# Allegro board ATLAS_PPGFPC_V1_A.brd
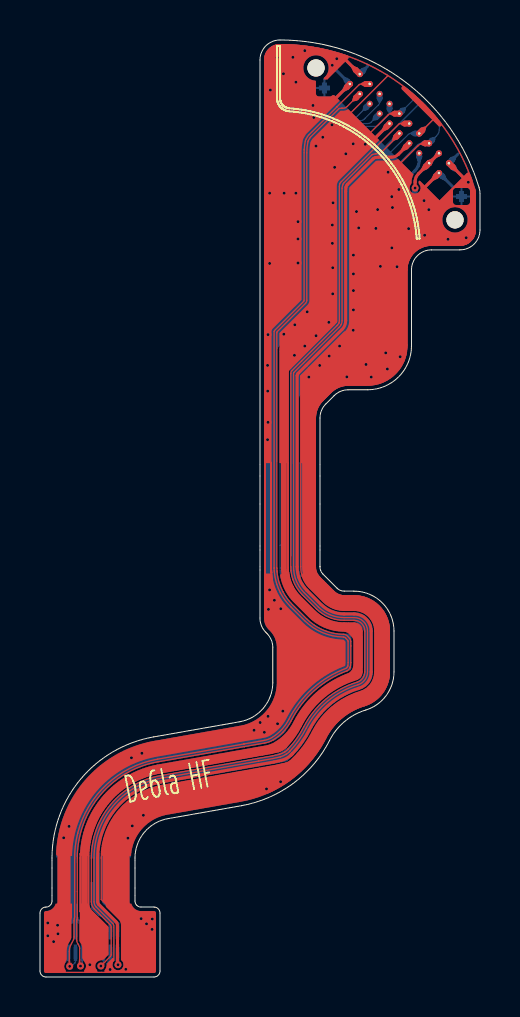
[diagram p0: board, top side]
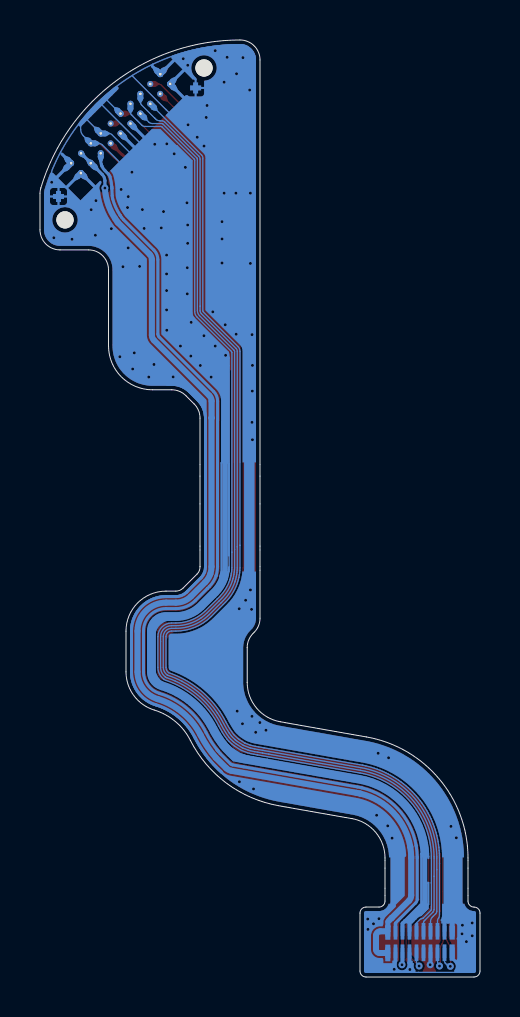
[diagram p1: board, bottom side, seen from below]

Outline 22 x 46.88 mm; copper layers: TOP, BOTTOM. Coordinates in mm from the lower left corner of the outline.
Outline path: 0,3.2 0,0.3 arc(0.09,0.09) 0.3,0 5.7,0 arc(5.91,0.09) 6,0.3 6,3.2 arc(5.91,3.41) 5.7,3.5 5.05,3.5 arc(4.84,3.59) 4.75,3.8 4.75,5.96 arc(5.22,7.24) 6.4,7.93 10.07,8.57 arc(12.66,9.69) 14.48,11.84 arc(15.23,12.78) 16.28,13.36 arc(17.31,14.08) 17.7,15.27 17.7,17.31 arc(17.11,18.72) 15.7,19.31 15.21,19.31 arc(15.02,19.34) 14.85,19.45 14.15,20.16 arc(14.08,20.25) 14.03,20.35 arc(14.01,20.44) 14,20.53 14,27.96 arc(14.08,28.35) 14.29,28.67 14.71,29.09 arc(15.03,29.3) 15.41,29.38 16.38,29.38 arc(17.93,30.02) 18.58,31.58 18.58,35.38 arc(18.87,36.09) 19.58,36.38 21,36.38 arc(21.71,36.67) 22,37.38 22,39.19 arc(21.99,39.34) 21.96,39.48 arc(18.2,44.83) 12,46.88 arc(11.29,46.59) 11,45.88 11,17.95 arc(11.08,17.57) 11.29,17.24 11.35,17.19 arc(11.56,16.86) 11.64,16.48 11.64,14.74 arc(11.17,13.46) 9.99,12.77 5.68,12.01 arc(2.04,9.91) 0.6,5.96 0.6,3.8 arc(0.51,3.59) 0.3,3.5 arc(0.09,3.41) 0,3.2

## Design rules (mm)
constraint set DEFAULT: min track width 0.06, pair gap 0.15

## Placement (name value [footprint] x y rotation side)
J2901  OK-114GM018-35(001A)  [CON18P_4D2X0D91X0D46_0D35]  3 1.75 180 bottom
M3001  -  [MARK_0D75_FPC]  14.22 44.48 180 bottom
M3002  -  [MARK_0D75_FPC]  21.08 39.05 180 bottom
NOREF  -  [unnamed]  20.75 37.88 0 top
NOREF#2  -  [unnamed]  13.8 45.48 0 top
TP3000  pthc0d127hc0d3  [PTHC0D127HC0D3]  18.96 42.2 0 top
TP3003  pthc0d127hc0d3  [PTHC0D127HC0D3]  20.45 40.72 0 top
TP3007  pthc0d127hc0d3  [PTHC0D127HC0D3]  17.97 43.19 0 top
TP3011  pthc0d127hc0d3  [PTHC0D127HC0D3]  18.96 41.21 0 top
TP3013  pthc0d127hc0d3  [PTHC0D127HC0D3]  16.49 44.68 0 top
TP3014  pthc0d127hc0d3  [PTHC0D127HC0D3]  15.99 44.18 0 top
TP3016  pthc0d127hc0d3  [PTHC0D127HC0D3]  16.98 43.19 0 top
TP3017  pthc0d127hc0d3  [PTHC0D127HC0D3]  16.49 43.69 0 top
TP3018  pthc0d127hc0d3  [PTHC0D127HC0D3]  17.48 43.69 0 top
TP3019  pthc0d127hc0d3  [PTHC0D127HC0D3]  16.98 44.18 0 top
TP3020  pthc0d127hc0d3  [PTHC0D127HC0D3]  19.46 41.71 0 top
TP3021  pthc0d127hc0d3  [PTHC0D127HC0D3]  19.46 40.72 0 top
TP3022  pthc0d127hc0d3  [PTHC0D127HC0D3]  19.95 41.21 0 top
TP3030  pthc0d127hc0d3  [PTHC0D127HC0D3]  18.47 41.71 0 top
TP3031  pthc0d127hc0d3  [PTHC0D127HC0D3]  15.99 45.17 0 top
TP3033  pthc0d127hc0d3  [PTHC0D127HC0D3]  17.48 42.7 0 top
TP3036  pthc0d127hc0d3  [PTHC0D127HC0D3]  17.97 42.2 0 top
TP3037  pthc0d127hc0d3  [PTHC0D127HC0D3]  15.5 44.68 0 top
TP3038  pthc0d127hc0d3  [PTHC0D127HC0D3]  18.47 42.7 0 top
TP3048  pthc0d127hc0d3  [PTHC0D127HC0D3]  19.95 40.22 0 top

## Library data of the parts
J2901 = OK-114GM018-35_001A
M3001 M3002 = MARK_0D75_FPC
TP3000 TP3003 TP3007 TP3011 TP3013 TP3014 TP3016-TP3022 TP3030 TP3031 TP3033 TP3036-TP3038 TP3048 = pthc0d127hc0d3

## Footprints (pads in the part's own frame, mm; a bottom-side part is the same pattern mirrored in y, then rotated)
CON18P_4D2X0D91X0D46_0D35
  rect 0.18x0.53 smd: 1(-1.225,-0.54) 2(-0.875,-0.54) 3(-0.525,-0.54) 4(-0.175,-0.54) 5(0.175,-0.54) 6(0.525,-0.54) 7(0.875,-0.54) 8(1.225,-0.54) 9(1.225,0.54) 10(0.875,0.54) 11(0.525,0.54) 12(0.175,0.54) 13(-0.175,0.54) 14(-0.525,0.54) 15(-0.875,0.54) 16(-1.225,0.54)
  rect 0.25x0.53 smd: 17(-1.61,0.54) 18(-1.61,-0.54) 19(1.61,-0.54) 20(1.61,0.54)
MARK_0D75_FPC
  custom 0.55x0.55 smd: 1(0,0)
PTHC0D127HC0D3
  round 0.3 hole 0.127: 1(0,0)
unnamed
  round 0.86 hole 0.86 unplated: (0,0)

## Nets
GND: J2901.1 J2901.3 J2901.6 J2901.9 J2901.14 J2901.15 J2901.19 J2901.20(P2_2) M3001.1 M3002.1 TP3000.1 TP3003.1 TP3007.1 TP3020.1 TP3031.1 TP3033.1 TP3036.1 TP3037.1 TP3048.1
AFE_2P8: J2901.2 TP3030.1
AFE_RST: J2901.7 TP3014.1
HRM_INT: J2901.8 TP3013.1
HRM_VLED_5V0: J2901.17 J2901.18 TP3021.1 TP3022.1
PB_THERM: J2901.4 TP3038.1
PPG_SPI1_CLK: J2901.12 TP3016.1
PPG_SPI1_CS: J2901.13 TP3018.1
PPG_SPI1_MISO: J2901.11 TP3019.1
PPG_SPI1_MOSI: J2901.10 TP3017.1
VREG_L20A_1P8: J2901.16 TP3011.1

Pads without a net: J2901 5

## Via types
v1: diameter 0.35, hole 0.15, TOP to BOTTOM, 110 vias

## Routing (per net, layer and track width the routed paths; a pad name or vN(x,y) marks a point on that pad's centre or on a via; arc(x,y) is an arc through that point)
GND: length 390.7
  TOP w0.06: 2.49,0.6 v1(2.49,0.62) 2.49,1.4 2.43,1.46 2.43,1.47 2.43,6.03 2.44,6.17 2.45,6.31 2.46,6.46 2.48,6.6 2.5,6.74 2.53,6.88 2.56,7.02 2.6,7.16 2.64,7.3 2.69,7.43 2.74,7.57 2.8,7.7 2.86,7.83 2.92,7.96 2.99,8.08 3.06,8.21 3.14,8.33 3.22,8.45 3.31,8.56 3.4,8.68 3.49,8.79 3.58,8.89 3.68,9 3.79,9.1 3.89,9.19 4,9.29 4.11,9.38 4.23,9.46 4.35,9.54 4.47,9.62 4.59,9.7 4.72,9.77 4.84,9.83 4.97,9.89 5.11,9.95 5.24,10 5.37,10.05 5.51,10.09 5.65,10.13 5.79,10.17 5.93,10.2 10.81,11.06 11.48,11.17 11.61,11.2 11.93,11.27 arc(12.13,11.36) 12.3,11.49 arc(12.72,12) 13.06,12.57 arc(14.2,14) 15.82,14.88 arc(16.03,15.03) 16.11,15.27 16.11,17.31 arc(15.99,17.59) 15.7,17.71 15.21,17.71 arc(14.41,17.87) 13.73,18.33 13.02,19.03 arc(12.81,19.27) 12.65,19.54 arc(12.64,19.54) 12.64,19.55 arc(12.57,19.7) 12.51,19.87 arc(12.45,20.09) 12.42,20.32 arc(12.41,20.34) 12.41,20.36 arc(12.41,20.37) 12.41,20.37 12.41,20.47 arc(12.41,20.48) 12.41,20.48 12.41,30.28 arc(12.42,30.33) 12.45,30.38 12.53,30.46 arc(12.53,30.46) 12.53,30.46 14.69,32.62 arc(14.75,32.68) 14.8,32.75 arc(14.82,32.77) 14.83,32.8 arc(14.83,32.82) 14.83,32.83 14.83,38.37 ; 2.49,0.6 2.49,0.52 arc(2.41,0.31) 2.21,0.23 ; 2.49,0.6 arc(2.6,0.34) 2.86,0.23 ; 2.86,0.23 2.21,0.23 ; 2.86,0.23 3.36,0.23 v1(3.51,0.38) ; 2.21,0.23 0.97,0.23 0.94,0.26 ; TP3036.1 17.76,41.99 17.76,41.97 arc(17.75,41.95) 17.74,41.93 17.03,41.22 arc(17.01,41.2) 16.98,41.2 16.91,41.2 arc(16.85,41.2) 16.8,41.19 arc(16.8,41.19) 16.8,41.19 arc(16.79,41.19) 16.79,41.19 arc(16.71,41.17) 16.64,41.16 arc(16.61,41.14) 16.59,41.13 15.18,39.71 arc(15.16,39.69) 15.15,39.66 arc(15.14,39.62) 15.13,39.58 arc(15.11,39.52) 15.1,39.46 15.1,32.83 arc(15.09,32.74) 15.06,32.65 arc(15.02,32.58) 14.98,32.53 14.95,32.5 13.18,30.73 12.7,30.25 arc(12.68,30.22) 12.68,30.19 12.68,20.53 arc(12.68,20.44) 12.68,20.35 arc(12.71,20.15) 12.77,19.95 arc(12.95,19.56) 13.21,19.22 13.92,18.52 arc(14.51,18.12) 15.21,17.98 15.7,17.98 arc(16.18,17.78) 16.38,17.31 16.38,15.27 arc(16.24,14.87) 15.9,14.62 arc(14.38,13.8) 13.3,12.44 arc(12.94,11.84) 12.49,11.3 arc(12.49,11.3) 12.49,11.29 arc(12.46,11.27) 12.43,11.24 arc(12.43,11.24) 12.43,11.23 arc(12.38,11.19) 12.33,11.16 arc(12.31,11.15) 12.3,11.14 arc(12.17,11.07) 12.03,11.02 arc(12.02,11.01) 12.01,11.01 11.67,10.93 10.93,10.8 arc(10.93,10.8) 10.93,10.8 6.05,9.94 arc(3.65,8.56) 2.7,5.96 2.7,3.77 arc(2.73,3.62) 2.81,3.5 3.66,2.66 arc(3.68,2.62) 3.69,2.58 arc(3.69,2.54) 3.69,2.5 3.69,0.84 3.51,0.66 v1(3.51,0.38) ; 19.78,42.94 19.7,42.94 19.08,42.33 ; 11.29,44.62 11.23,44.68 11.23,45.88 11.24,46.03 11.29,46.18 11.36,46.31 11.4,46.35 arc(11.66,46.57) 12,46.65 arc(14.8,46.26) 17.38,45.11 ; 17.75,43.19 17.55,43.19 arc(17.47,43.18) 17.41,43.14 16.45,42.17 ; 15.23,32.27 13.43,30.47 13.06,30.1 arc(13.04,30.07) 13.04,30.05 13.04,20.53 arc(13.05,20.29) 13.11,20.06 arc(13.25,19.75) 13.46,19.48 14.17,18.77 arc(14.65,18.45) 15.21,18.34 15.7,18.34 arc(16.43,18.04) 16.74,17.31 16.74,15.27 arc(16.53,14.65) 16,14.28 arc(14.61,13.52) 13.62,12.28 arc(13.13,11.49) 12.49,10.8 12.43,10.74 11.74,10.58 10.97,10.44 6.11,9.59 arc(3.92,8.33) 3.06,5.96 3.06,3.88 3.98,2.96 3.98,2.94 4.04,2.88 4.16,2.88 ; v1(3.51,0.38) 3.65,0.23 4.12,0.23 ; 19.12,41.71 19.26,41.71 ; 17.86,40.58 17.89,40.58 18.89,41.57 arc(19.01,41.66) 19.15,41.71 ; 15.32,43.17 15.47,43.17 17.38,45.08 17.38,45.11 ; 17.38,45.11 arc(19.95,42.83) 21.61,39.82
  TOP w0.1: 12.26,25.85 12.39,25.72 12.39,20.48 12.4,20.23 12.41,20.23 arc(12.43,20.1) 12.46,19.97 ; 2.13,6.21 2.07,6.21 2.02,6.16 arc(2.02,6.06) 2.02,5.96 2.02,3.29 2.07,3.24 ; 21.68,39.05 21.7,39.03 ; 11.48,25.79 11.55,25.72 11.55,20.48 11.55,20.45 11.55,20.43 11.56,20.3 11.56,20.27 11.59,19.92 11.6,19.91 11.6,19.88 ; 2.29,6.22 2.41,6.09 2.41,3.34 2.38,3.31 ; 11.29,25.84 11.25,25.81 11.25,19.97
  TOP w0.15: 15.21,45.96 15.21,45.96 ; 17.33,42.54 16.69,41.9 16.69,41.9 ; 15.79,45.37 15.22,45.95 ; 19.11,39.38 19.8,40.07 ; 14.59,43.77 14.59,43.78 15.36,44.54 ; 20.63,40.53 21.27,39.89 21.27,39.88 ; 19.08,42.33 19.08,42.33 ; 14.66,45.51 14.67,45.51
  TOP w0.2: 21.67,39.4 21.7,39.26 21.7,39.25 21.7,37.35 21.69,37.24 21.65,37.11 21.58,36.99 21.39,36.8 21.27,36.73 21.14,36.69 21,36.68 19.45,36.68 19.2,36.63 18.96,36.53 18.75,36.39 18.57,36.21 18.42,35.99 18.32,35.76 18.28,35.51 ; 18.28,35.57 18.28,35.51 ; 18.28,35.51 18.28,35.4 arc(18.27,35.39) 18.27,35.38 18.27,31.63 arc(18.27,31.58) 18.27,31.53 18.25,31.31 arc(18.23,31.21) 18.21,31.11 18.14,30.9 arc(18.13,30.85) 18.11,30.81 18,30.61 arc(17.95,30.53) 17.88,30.45 17.59,30.16 arc(17.3,29.93) 16.96,29.78 arc(16.62,29.71) 16.27,29.68 15.41,29.68 arc(14.92,29.58) 14.49,29.3 14.08,28.88 arc(13.8,28.46) 13.7,27.97 13.7,20.53 arc(13.71,20.4) 13.74,20.26 arc(13.82,20.09) 13.93,19.95 14.64,19.24 arc(14.9,19.07) 15.21,19.01 15.7,19.01 arc(16.9,18.51) 17.4,17.31 17.4,15.27 arc(17.07,14.26) 16.2,13.64 arc(15.04,13.01) 14.22,11.98 arc(13.01,10.37) 11.33,9.26
  TOP w0.3: 17.82,42.05 17.97,42.2 TP3036.1 ; TP3033.1 17.48,42.69 17.33,42.54 ; 19.26,41.71 TP3020.1 ; 17.97,43.2 TP3007.1 17.75,43.19 ; 20.63,40.53 TP3003.1 ; TP3000.1 18.96,42.2 19.08,42.33 ; 19.8,40.07 TP3048.1 ; TP3037.1 15.36,44.54 ; TP3031.1 15.79,45.37
  BOTTOM w0.06: 19.58,41.83 19.8,42.05 19.83,42.09 arc(19.93,42.23) 19.97,42.41 19.97,42.67 ; 18.96,43.69 16.93,41.66 16.93,41.6 ; 20.89,41.16 20.97,41.25 20.97,41.26 ; 0.3,0.45 0.52,0.23 3.08,0.23 3.36,0.23 v1(3.51,0.38) 3.63,0.25 arc(3.66,0.24) 3.68,0.23 4.37,0.23 arc(4.41,0.25) 4.43,0.29 4.39,0.29 4.3,0.39 ; 11.26,44.07 11.23,44.1 11.23,45.09 11.23,45.88 arc(11.46,46.43) 12,46.65 arc(14.23,46.4) 16.36,45.67 ; 4.3,0.39 4.3,0.39 4.54,0.62 4.83,0.62 5.15,0.29 ; 4.3,0.39 v1(4.29,0.39) ; 19.28,41.71 19.08,41.71 arc(18.97,41.69) 18.88,41.63 17.85,40.6 arc(17.85,40.6) 17.85,40.59 ; 21.42,40 21.41,40.01 arc(21.4,40.03) 21.39,40.05 21.42,40.08 arc(21.44,40.11) 21.44,40.14 arc(21.42,40.28) 21.38,40.41 arc(21.19,40.84) 20.97,41.26 ; 19.09,42.34 19.7,42.94 ; 16.36,45.67 16.38,45.65 16.38,45.56 ; 16.36,45.67 arc(16.88,45.4) 17.39,45.1 ; 16.77,41.99 16.13,41.99 15.72,41.59 15.15,41.59 14.4,40.84 14.4,33.22 arc(14.37,33.09) 14.3,32.98 12.61,31.29 arc(12.59,31.27) 12.59,31.24 12.54,30.97 arc(12.54,30.97) 12.54,30.96 12.54,30.59 12.54,20.53 arc(12.56,20.22) 12.64,19.91 arc(12.64,19.9) 12.64,19.9 arc(12.83,19.48) 13.11,19.13 13.22,19.02 arc(13.22,19.02) 13.22,19.02 13.82,18.42 arc(14.46,18) 15.21,17.85 15.7,17.85 arc(16.08,17.69) 16.24,17.31 16.24,15.27 arc(16.13,14.95) 15.86,14.75 arc(14.29,13.9) 13.18,12.5 arc(13.1,12.34) 13.01,12.19 arc(12.8,11.88) 12.58,11.6 arc(12.58,11.6) 12.58,11.59 arc(12.57,11.59) 12.57,11.58 arc(12.56,11.58) 12.56,11.57 12.17,11.19 arc(12.15,11.17) 12.12,11.16 11.81,11.11 arc(11.74,11.09) 11.67,11.08 arc(11.61,11.06) 11.55,11.05 11.34,11.01 11.04,10.96 10.81,10.92 10.65,10.89 arc(10.65,10.89) 10.65,10.89 10.61,10.89 arc(10.61,10.89) 10.61,10.88 6.02,10.08 arc(3.65,8.77) 2.58,6.27 arc(2.57,6.15) 2.57,6.03 ; 18.75,43.96 18.74,43.96 18.1,43.33 ; 20.97,41.26 arc(19.44,43.42) 17.39,45.1 ; 18.78,42.2 18.54,42.2 arc(18.47,42.19) 18.42,42.16 17.46,41.2 arc(17.41,41.17) 17.36,41.16 ; 17.39,45.1 arc(17.39,45.09) 17.38,45.08 15.69,43.39 15.47,43.16 arc(15.44,43.12) 15.42,43.06
  BOTTOM w0.1: 21.59,39.06 21.59,39.05 M3002.1 ; 14.37,45.05 14.22,44.91 M3001.1 ; 4.23,0.77 4.23,0.5 4.3,0.43 4.3,0.4 v1(4.29,0.39) ; 14.23,43.88 14.22,43.89 M3001.1 ; 20.51,39.05 20.51,39.05 M3002.1 ; M3002.1 21.08,38.54 21.07,38.54 ; M3002.1 21.08,39.6 21.09,39.6 ; 2.96,3.39 2.94,3.41 2.94,6.17 2.88,6.23 ; 2.65,3.58 2.59,3.64 2.59,4.71 2.59,4.71 ; M3001.1 13.67,44.48 13.66,44.49 ; 12.56,20.48 12.57,20.39 12.57,20.29 12.71,20.15 ; 2.59,5.95 2.59,6.03 2.61,6.11 ; 13,20.03 12.92,20.27 12.92,25.72 12.85,25.79 ; 12.64,25.77 12.56,25.68 12.56,21.1 12.56,21.1
  BOTTOM w0.15: 15.63,29.65 15.29,29.65 arc(14.87,29.53) 14.51,29.28 14.1,28.87 arc(13.82,28.45) 13.72,27.97 13.72,20.53 arc(13.73,20.4) 13.76,20.27 arc(13.84,20.11) 13.95,19.97 14.66,19.26 arc(14.91,19.09) 15.21,19.03 15.7,19.03 arc(16.92,18.53) 17.42,17.31 17.42,15.27 arc(17.09,14.24) 16.2,13.62 arc(15.05,12.99) 14.24,11.97 arc(13.66,11.05) 12.93,10.26 ; 1.11,0.66 1.39,0.94 J2901.19 ; 0.95,2.2 0.9,2.14 0.9,2.16 v1(0.9,2.16) ; 15.38,44.79 15.38,44.79 14.72,45.46 ; 21.25,39.92 20.67,40.49 20.67,40.49 ; 19.82,40.1 19.19,39.46 19.19,39.37 ; 20.66,39.51 20.1,40.08 ; 16.14,45.32 16.38,45.56 ; 17.33,42.56 16.72,41.95 16.69,41.95 ; 17.16,41.4 17.16,41.4 17.83,42.07 ; 15.34,44.53 14.68,43.86 14.66,43.86 ; 20.89,41.16 20.6,40.87 ; 15.17,45.93 15.24,45.93 15.84,45.33
  BOTTOM w0.17: 4.22,0.8 4.23,0.81 J2901.1
  BOTTOM w0.18: J2901.6 2.48,0.63 v1(2.49,0.62) ; J2901.9 1.77,2.9 1.78,2.9 ; J2901.3 3.52,0.7 3.51,0.68 v1(3.51,0.38) ; J2901.15 3.88,2.68 3.76,2.8 ; 3.52,2.85 J2901.14
  BOTTOM w0.2: 20.67,40.49 20.67,40.47 ; 0.3,2.8 0.3,0.45
  BOTTOM w0.25: 1.39,2.83 J2901.20
  BOTTOM w0.3: 19.82,40.1 TP3048.1 20.1,40.08 ; 20.67,40.49 20.45,40.72 TP3003.1 20.6,40.87 ; TP3031.1 15.99,45.18 15.84,45.33 ; TP3031.1 16.14,45.32 ; TP3031.1 15.99,45.17 ; 19.58,41.83 TP3020.1 19.28,41.71 ; 15.38,44.79 TP3037.1 15.34,44.53 ; 17.33,42.56 TP3033.1 ; 18.78,42.2 TP3000.1 19.09,42.34 ; TP3007.1 18.1,43.33 ; 17.83,42.07 TP3036.1
  vias: v1(0.39,2.7) v1(0.39,2.06) v1(0.68,1.77) v1(0.88,2.59) v1(1.18,6.96) v1(1.45,7.54) v1(4.4,6.95) v1(4.57,10.97) v1(4.61,7.56) v1(5.09,11.19) v1(5.05,2.92) v1(5.17,8.09) v1(5.33,2.66) v1(5.61,2.9) v1(5.6,2.38) v1(10.7,12.35) v1(11.01,12.73) v1(11.22,12.24) v1(11.32,9.41) v1(11.4,32.14) v1(11.38,30.6) v1(11.38,29.31) v1(11.4,27.75) v1(11.38,26.88) v1(11.42,18.39) v1(11.4,13.04) v1(11.52,44.38) v1(11.48,39.22) v1(11.48,35.7) v1(11.48,19.37) v1(11.72,18.85) v1(11.85,46) v1(11.88,12.67) v1(12.04,18.42) v1(12.03,9.77) v1(12.14,13.3) v1(12.17,45.19) v1(12.2,39.22) v1(12.19,32.16) v1(12.64,46.01) v1(12.74,32.63) v1(12.72,31.1) v1(12.8,44.77) v1(12.79,39.22) v1(12.9,37.79) v1(12.9,36.93) v1(12.9,35.72) v1(13.24,46.35) v1(13.24,31.57) v1(13.36,33.28) v1(13.44,30.02) v1(13.65,43.6) v1(13.69,43) v1(13.8,41.57) v1(13.8,32.08) v1(13.98,30.6) v1(14.14,42.01) v1(14.44,32.75) v1(14.46,31.07) v1(14.61,45.61) v1(14.6,42.64) v1(14.62,37.62) v1(14.62,36.71) v1(14.64,35.49) v1(14.64,34.18) v1(14.73,40.51) v1(14.65,38.73) v1(14.84,45.94) v1(14.98,31.57) v1(15.29,41.19) v1(15.34,30.02) v1(15.66,41.68) v1(15.67,36.12) v1(15.67,35.18) v1(15.67,34.34) v1(15.67,33.38) v1(15.66,32.36) v1(15.82,38.3) v1(15.94,37.48) v1(16.26,41.66) v1(16.3,30.65) v1(16.56,30.02) v1(16.79,37.45) v1(16.88,38.4) v1(17.02,35.55) v1(17.28,31.23) v1(17.4,40.27) v1(17.37,30.42) v1(17.59,39.04) v1(17.62,38.5) v1(17.59,36.48) v1(17.94,39.4) v1(17.85,35.54) v1(18.01,31.03) v1(18.43,37.44) v1(19.2,38.84) v1(19.23,37.11) v1(19.44,38.39) v1(20.4,36.91) v1(21.31,36.99) v1(21.42,39.76)
AFE_2P8: length 55.9
  TOP w0.15: 18.3,41.54 17.92,41.16 arc(17.76,41.05) 17.57,41.02 16.93,41.02 arc(16.86,41.01) 16.78,41 arc(16.71,40.98) 16.65,40.93 15.36,39.64 arc(15.32,39.58) 15.3,39.51 arc(15.29,39.41) 15.28,39.31 15.28,32.83 arc(15.24,32.6) 15.1,32.4 13.31,30.6 12.9,30.2 arc(12.87,30.15) 12.86,30.09 12.86,20.53 arc(12.88,20.27) 12.94,20 arc(13.1,19.65) 13.34,19.35 14.04,18.64 arc(14.58,18.29) 15.21,18.16 15.7,18.16 arc(16.31,17.91) 16.56,17.31 16.56,15.27 arc(16.39,14.76) 15.95,14.45 arc(14.49,13.66) 13.46,12.36 arc(13.09,11.74) 12.62,11.17 arc(12.62,11.17) 12.62,11.17 arc(12.62,11.17) 12.62,11.17 arc(12.59,11.14) 12.56,11.11 arc(12.56,11.11) 12.56,11.11 arc(12.55,11.1) 12.55,11.1 arc(12.32,10.94) 12.06,10.84 11.7,10.76 10.93,10.62 6.08,9.77 arc(6.04,9.76) 6,9.75 arc(3.76,8.41) 2.88,5.96 2.88,3.77 arc(2.9,3.69) 2.94,3.63 3.8,2.77 arc(3.85,2.69) 3.87,2.59 3.87,0.64 v1(3.9,0.61)
  TOP w0.3: 18.3,41.54 TP3030.1
  BOTTOM w0.18: J2901.2 3.88,0.64 v1(3.9,0.61)
AFE_RST: length 56.7
  TOP w0.06: v1(2.02,0.55) 2,0.57 arc(1.99,0.6) 1.98,0.63 1.98,1.43 arc(1.96,1.54) 1.91,1.64 arc(1.86,1.74) 1.84,1.85 1.84,2.81 arc(1.84,2.85) 1.85,2.89 arc(1.86,2.93) 1.87,2.96 1.87,4.28 1.87,5.96 arc(3.01,9.1) 5.9,10.77 10.22,11.53 arc(10.22,11.53) 10.22,11.53 10.22,11.53 11.24,11.71 arc(11.45,11.77) 11.66,11.86 arc(11.91,12.03) 12.14,12.24 arc(12.14,12.24) 12.14,12.24 arc(12.37,12.52) 12.56,12.82 arc(13.72,14.33) 15.35,15.32 arc(15.35,15.32) 15.36,15.33 arc(15.44,15.38) 15.49,15.46 arc(15.5,15.47) 15.5,15.47 15.5,15.49 arc(15.51,15.51) 15.52,15.53 arc(15.52,15.53) 15.52,15.54 arc(15.52,15.54) 15.52,15.54 arc(15.54,15.64) 15.54,15.74 15.54,16.79 arc(15.53,16.87) 15.49,16.93 15.38,17.05 arc(15.29,17.12) 15.17,17.15 arc(14.41,17.27) 13.72,17.6 arc(13.51,17.76) 13.33,17.93 12.62,18.63 arc(12.36,18.94) 12.14,19.28 arc(12.14,19.28) 12.14,19.29 arc(12.05,19.49) 11.97,19.69 arc(11.9,19.98) 11.85,20.27 arc(11.85,20.28) 11.85,20.3 arc(11.85,20.32) 11.85,20.35 11.84,20.45 arc(11.84,20.46) 11.84,20.48 11.84,32.24 arc(11.85,32.27) 11.86,32.29 13.28,33.71 arc(13.32,33.78) 13.34,33.86 13.34,41.24 arc(13.35,41.52) 13.4,41.8 arc(13.41,41.83) 13.42,41.85 13.49,41.98 arc(13.51,42) 13.53,42.03 14.93,43.43 arc(14.95,43.44) 14.98,43.46 arc(15.03,43.47) 15.08,43.47 15.12,43.47 arc(15.25,43.48) 15.36,43.55 15.81,44
  TOP w0.3: 15.81,44 TP3014.1
  BOTTOM w0.06: v1(2.02,0.55) 2.06,0.58 arc(2.11,0.66) 2.12,0.74 J2901.7
HRM_INT: length 57.8
  TOP w0.06: 14.85,43.53 14.85,43.53 ; 14.85,43.53 13.46,42.14 arc(13.41,42.1) 13.38,42.05 13.3,41.92 arc(13.28,41.87) 13.27,41.82 arc(13.23,41.61) 13.21,41.39 arc(13.21,41.38) 13.21,41.38 arc(13.21,41.31) 13.21,41.24 13.21,33.86 arc(13.2,33.83) 13.18,33.8 11.73,32.35 arc(11.71,32.32) 11.71,32.29 11.71,20.48 arc(11.71,20.46) 11.71,20.44 11.71,20.34 arc(11.71,20.31) 11.72,20.28 arc(11.72,20.27) 11.72,20.25 arc(11.76,19.95) 11.84,19.65 arc(11.92,19.44) 12.02,19.23 arc(12.02,19.22) 12.02,19.22 arc(12.25,18.86) 12.52,18.54 arc(12.52,18.54) 12.53,18.54 arc(12.53,18.53) 12.53,18.53 13.23,17.83 arc(14.12,17.23) 15.17,17.01 arc(15.23,17) 15.28,16.96 15.38,16.85 arc(15.4,16.82) 15.41,16.79 15.41,15.74 arc(15.4,15.65) 15.39,15.57 arc(15.39,15.56) 15.39,15.56 arc(15.38,15.55) 15.38,15.54 15.37,15.52 arc(15.36,15.49) 15.33,15.47 arc(15.31,15.45) 15.28,15.44 arc(13.62,14.43) 12.44,12.88 arc(12.08,12.37) 11.59,11.98 arc(11.41,11.89) 11.21,11.84 10.2,11.66 arc(10.2,11.66) 10.2,11.66 5.88,10.9 arc(3.34,9.64) 1.89,7.2 arc(1.89,7.19) 1.88,7.19 arc(1.77,6.58) 1.73,5.96 1.73,4.28 1.73,3.01 arc(1.73,2.96) 1.72,2.91 arc(1.71,2.86) 1.7,2.81 1.7,2 arc(1.7,1.94) 1.68,1.87 arc(1.63,1.77) 1.58,1.68 arc(1.49,1.49) 1.46,1.28 1.46,0.55 v1(1.48,0.53) ; 14.85,43.53 arc(14.85,43.53) 14.85,43.53 ; 14.85,43.53 15.94,44.62 arc(16,44.67) 16.07,44.68 16.3,44.68
  TOP w0.3: 16.3,44.68 TP3013.1
  BOTTOM w0.06: J2901.8 1.77,0.78 arc(1.77,0.74) 1.74,0.71 1.64,0.6 arc(1.57,0.55) v1(1.48,0.53)
HRM_VLED_5V0: length 57.3
  TOP w0.15: v1(18.75,39.47) 18.75,39.77 arc(18.8,40) 18.93,40.19 19.31,40.57 ; TP3021.1 TP3022.1
  TOP w0.3: 19.46,40.72 TP3021.1 19.31,40.57
  BOTTOM w0.15: 19.29,40.55 18.89,40.15 arc(18.79,40.01) 18.76,39.85 arc(18.76,39.84) 18.75,39.83 v1(18.75,39.47) ; TP3022.1 TP3021.1
  BOTTOM w0.25: 4.73,1.2 4.62,1.2 J2901.18 ; 4.72,2.29 J2901.17 4.61,2.53 4.61,2.54 4.61,2.77 4.54,2.83
  BOTTOM w0.3: TP3021.1 19.29,40.55 ; 4.66,1.21 4.73,1.21 4.73,1.2 5.02,1.2 arc(5.15,1.25) 5.2,1.38 5.2,2.07 arc(5.13,2.22) 4.98,2.29 4.72,2.29 ; 4.54,2.83 4.42,2.95 4.41,2.95 3.55,3.82 arc(3.47,3.94) 3.44,4.09 3.44,5.95 3.44,6.02 arc(3.45,6.26) 3.49,6.5 3.49,6.53 arc(4.34,8.22) 5.97,9.17 6,9.18 arc(6.09,9.2) 6.18,9.22 12.43,10.32 arc(12.57,10.37) 12.69,10.45 13.21,10.97 arc(13.63,11.52) 13.97,12.1 arc(14.86,13.22) 16.12,13.91 arc(16.85,14.42) 17.12,15.27 17.12,17.31 arc(16.71,18.31) 15.7,18.73 15.21,18.73 arc(14.8,18.81) 14.45,19.05 13.74,19.75 arc(13.58,19.95) 13.48,20.18 arc(13.44,20.35) 13.42,20.53 13.42,27.97 13.42,27.97 13.42,27.98 13.42,28.82 arc(13.45,28.96) 13.53,29.09 16.29,31.85 arc(16.38,31.97) 16.41,32.12 16.41,35.89 arc(16.44,36.04) 16.52,36.16 18.09,37.73 arc(18.11,37.76) 18.13,37.78 18.24,37.94 arc(18.6,38.67) v1(18.75,39.47)
PB_THERM: length 57.1
  TOP w0.06: v1(3.04,0.55) 3.52,1.03 arc(3.55,1.07) 3.56,1.12 3.56,2.5 arc(3.55,2.56) 3.51,2.61 2.71,3.41 arc(2.6,3.57) 2.57,3.77 2.57,5.96 arc(3.55,8.65) 6.02,10.08 10.88,10.93 10.89,10.93 11.64,11.07 11.98,11.14 arc(11.98,11.14) 11.98,11.15 arc(12.11,11.19) 12.23,11.26 arc(12.24,11.27) 12.26,11.28 arc(12.3,11.3) 12.34,11.33 arc(12.36,11.36) 12.39,11.39 arc(12.39,11.39) 12.4,11.39 arc(12.4,11.39) 12.4,11.39 arc(12.83,11.92) 13.18,12.5 arc(14.29,13.9) 15.86,14.75 arc(16.13,14.95) 16.24,15.27 16.24,17.31 arc(16.08,17.69) 15.7,17.85 15.21,17.85 arc(14.46,18) 13.82,18.42 13.11,19.13 arc(12.83,19.49) 12.64,19.9 arc(12.64,19.91) 12.64,19.91 arc(12.58,20.12) 12.55,20.33 arc(12.54,20.43) 12.54,20.53 12.54,30.19 arc(12.56,30.28) 12.6,30.34 13.08,30.82 14.88,32.62 arc(14.91,32.66) 14.94,32.7 14.94,32.7 arc(14.95,32.73) 14.96,32.76 arc(14.97,32.8) 14.97,32.83 14.97,39.55 arc(14.97,39.62) 14.99,39.7 arc(15.01,39.73) 15.03,39.76 16.69,41.41 arc(16.69,41.41) 16.69,41.41 17.94,42.67 arc(17.97,42.69) 18.01,42.7 18.27,42.7
  TOP w0.3: TP3038.1 18.27,42.7
  BOTTOM w0.06: v1(3.04,0.55) 3.14,0.64 arc(3.16,0.69) 3.17,0.74 J2901.4
PPG_SPI1_CLK: length 54.1
  BOTTOM w0.06: J2901.12 2.83,2.73 arc(2.82,2.77) 2.79,2.81 2.76,2.84 2.35,3.25 arc(2.31,3.31) 2.3,3.38 2.3,5.04 2.3,5.95 2.3,6.04 arc(3.36,8.85) 5.98,10.34 10.56,11.15 10.87,11.2 arc(10.87,11.21) 10.87,11.21 11.29,11.28 11.5,11.32 arc(11.54,11.34) 11.59,11.35 11.86,11.45 arc(11.89,11.47) 11.92,11.49 12.21,11.67 arc(12.25,11.7) 12.29,11.74 12.34,11.78 arc(12.34,11.78) 12.34,11.78 12.46,11.9 arc(12.5,11.94) 12.54,11.98 arc(12.75,12.3) 12.94,12.63 arc(13.9,13.92) 15.24,14.81 arc(15.45,14.89) 15.65,14.97 arc(15.69,14.99) 15.73,15.01 arc(15.91,15.22) 15.97,15.49 15.97,16.78 arc(15.97,16.78) 15.97,16.78 15.97,17.03 arc(15.81,17.42) 15.42,17.58 15.21,17.58 arc(14.55,17.68) 13.94,17.97 arc(13.78,18.09) 13.63,18.23 13.03,18.83 arc(13.03,18.83) 13.03,18.83 12.92,18.94 arc(12.6,19.34) 12.38,19.81 12.37,19.85 12.35,19.94 12.32,20.04 12.3,20.15 12.29,20.26 12.28,20.37 12.27,20.47 12.27,21.39 12.27,31.3 arc(12.28,31.33) 12.29,31.35 14.03,33.09 arc(14.1,33.2) 14.13,33.33 14.13,40.92 arc(14.14,40.95) 14.15,40.97 15.86,42.68 arc(15.88,42.69) 15.91,42.7 16.37,42.7 arc(16.47,42.72) 16.56,42.77 16.81,43.03
  BOTTOM w0.3: TP3016.1 16.81,43.03
PPG_SPI1_CS: length 55.1
  BOTTOM w0.06: J2901.13 3.17,2.67 arc(3.17,2.69) 3.17,2.71 3.02,2.86 3.02,2.87 arc(2.98,2.9) 2.94,2.91 arc(2.88,2.93) 2.83,2.96 ; 17.48,43.46 17.48,43.25 arc(17.47,43.19) 17.43,43.14 16.91,42.62 arc(16.84,42.57) 16.75,42.55 15.95,42.55 arc(15.92,42.55) 15.9,42.53 14.29,40.92 arc(14.27,40.89) 14.27,40.86 14.27,33.29 arc(14.24,33.15) 14.16,33.03 12.43,31.3 arc(12.41,31.27) 12.41,31.24 12.41,21.25 12.41,20.48 12.41,20.38 12.42,20.27 12.43,20.17 12.45,20.07 12.48,19.97 12.5,19.89 12.51,19.85 arc(12.72,19.41) 13.02,19.03 13.12,18.93 arc(13.13,18.93) 13.13,18.92 13.73,18.33 arc(13.94,18.14) 14.17,17.99 arc(14.67,17.78) 15.21,17.71 15.42,17.71 arc(15.91,17.51) 16.11,17.03 16.11,15.49 arc(16.03,15.16) 15.81,14.9 arc(15.81,14.9) 15.81,14.9 arc(15.75,14.87) 15.7,14.84 arc(15.49,14.77) 15.3,14.69 arc(14,13.82) 13.06,12.57 arc(12.98,12.41) 12.89,12.26 arc(12.77,12.08) 12.65,11.9 arc(12.6,11.85) 12.55,11.8 12.43,11.68 arc(12.43,11.68) 12.43,11.68 12.38,11.64 arc(12.33,11.6) 12.28,11.56 11.99,11.37 arc(11.95,11.35) 11.9,11.33 11.64,11.23 arc(11.58,11.21) 11.52,11.19 11.31,11.15 11.13,11.11 arc(11.13,11.11) 11.13,11.11 6,10.21 arc(3.47,8.76) 2.43,6.03 2.43,5.95 2.43,4.71 2.43,3.39 arc(2.44,3.36) 2.45,3.34 2.83,2.96 ; 2.84,2.95 2.83,2.96
  BOTTOM w0.3: 17.48,43.46 TP3018.1
PPG_SPI1_MISO: length 54.9
  BOTTOM w0.06: J2901.11 2.48,2.78 arc(2.45,2.89) 2.39,2.99 2.34,3.04 2.21,3.17 arc(2.17,3.22) 2.16,3.29 2.16,5.37 2.16,5.37 2.16,5.96 2.16,6.04 arc(3.26,8.94) 5.95,10.48 10.54,11.28 arc(10.54,11.28) 10.54,11.28 10.85,11.34 arc(10.85,11.34) 10.85,11.34 11.26,11.41 11.47,11.46 arc(11.51,11.47) 11.54,11.48 11.81,11.58 arc(11.83,11.59) 11.84,11.6 12.13,11.79 arc(12.17,11.81) 12.2,11.84 12.24,11.88 arc(12.24,11.88) 12.25,11.88 12.37,12 arc(12.4,12.03) 12.43,12.06 arc(12.48,12.13) 12.53,12.2 arc(12.54,12.21) 12.54,12.21 arc(12.69,12.44) 12.82,12.69 arc(12.97,12.95) 13.13,13.21 13.13,13.21 arc(13.13,13.21) 13.13,13.22 arc(13.92,14.11) 14.9,14.79 arc(14.9,14.8) 14.91,14.8 arc(15.25,14.96) 15.61,15.1 arc(15.63,15.11) 15.65,15.12 arc(15.79,15.28) 15.84,15.49 15.84,17.03 arc(15.71,17.32) 15.42,17.44 15.21,17.44 arc(14.36,17.6) 13.63,18.05 arc(13.58,18.09) 13.54,18.13 12.94,18.73 arc(12.94,18.73) 12.93,18.74 12.83,18.84 arc(12.49,19.27) 12.26,19.77 12.24,19.81 12.22,19.9 12.19,20.02 12.17,20.13 12.15,20.24 12.14,20.36 12.14,20.47 12.14,21.52 12.14,31.3 arc(12.15,31.38) 12.2,31.45 13.93,33.19 arc(13.98,33.25) 13.99,33.33 13.99,40.92 arc(14.01,41) 14.06,41.07 15.77,42.78 arc(15.82,42.82) 15.89,42.83 15.97,42.83 arc(16,42.84) 16.03,42.84 arc(16.13,42.86) 16.2,42.91 16.27,42.98 ; 16.27,42.98 16.93,43.64 arc(16.97,43.7) 16.98,43.77 16.98,43.98 ; 16.27,42.98 16.27,42.98
  BOTTOM w0.3: TP3019.1 16.98,43.98
PPG_SPI1_MOSI: length 54
  BOTTOM w0.06: J2901.10 2.12,2.81 arc(2.11,2.89) 2.06,2.96 arc(2.04,3.03) 2.03,3.11 2.03,5.69 2.03,5.96 2.03,6.04 2.03,6.07 2.03,6.18 2.04,6.33 2.05,6.48 2.07,6.63 2.1,6.78 2.13,6.92 2.16,7.07 2.2,7.21 2.24,7.36 2.29,7.5 2.34,7.64 2.39,7.78 2.45,7.92 2.52,8.05 2.59,8.19 2.66,8.32 2.74,8.45 2.82,8.57 2.9,8.7 2.99,8.82 3.08,8.93 3.18,9.05 3.28,9.16 3.38,9.27 3.49,9.38 3.6,9.48 3.71,9.58 3.83,9.67 3.95,9.76 4.07,9.85 4.2,9.93 4.32,10.01 4.45,10.08 4.59,10.16 4.72,10.22 4.86,10.28 4.99,10.34 5.13,10.4 5.28,10.44 5.42,10.49 5.56,10.53 5.71,10.56 5.86,10.6 5.87,10.6 10.78,11.46 11.24,11.54 11.44,11.59 arc(11.47,11.6) 11.49,11.61 11.76,11.71 arc(11.77,11.71) 11.77,11.71 12.06,11.9 arc(12.08,11.92) 12.11,11.94 12.28,12.1 arc(12.3,12.12) 12.32,12.14 arc(12.52,12.44) 12.7,12.75 arc(12.85,13.02) 13.02,13.29 arc(13.02,13.29) 13.02,13.29 arc(14.14,14.47) 15.57,15.23 arc(15.67,15.34) 15.7,15.49 15.7,17.03 arc(15.62,17.23) 15.42,17.31 15.21,17.31 arc(14.25,17.5) 13.44,18.04 12.84,18.63 arc(12.84,18.64) 12.84,18.64 12.73,18.75 arc(12.37,19.2) 12.13,19.73 12.11,19.77 12.08,19.87 12.06,19.99 12.03,20.11 12.02,20.23 12.01,20.35 12,20.47 12,21.6 arc(12,21.6) 12,21.6 12,31.3 arc(12.03,31.43) 12.1,31.55 13.84,33.28 arc(13.85,33.31) 13.86,33.33 13.86,40.94 arc(13.87,41.04) 13.92,41.12 16.31,43.52
  BOTTOM w0.3: 16.31,43.52 TP3017.1
VREG_L20A_1P8: length 52.8
  BOTTOM w0.15: J2901.16 4.23,2.7 3.22,3.71 arc(3.16,3.79) 3.14,3.89 3.14,5.95 3.14,6.02 arc(3.16,6.29) 3.19,6.55 3.2,6.58 arc(4.12,8.43) 5.9,9.46 5.93,9.47 arc(6.03,9.49) 6.12,9.51 11.82,10.52 12.38,10.61 arc(12.43,10.63) 12.48,10.67 12.99,11.18 arc(13.08,11.29) 13.17,11.4 13.09,11.3 arc(13.42,11.75) 13.7,12.24 arc(14.67,13.45) 16.03,14.19 arc(16.6,14.6) 16.82,15.27 16.82,17.31 arc(16.5,18.1) 15.7,18.43 15.21,18.43 arc(14.68,18.54) 14.23,18.83 13.64,19.43 arc(13.63,19.43) 13.63,19.44 13.53,19.54 arc(13.33,19.79) 13.19,20.08 arc(13.19,20.09) 13.19,20.09 arc(13.14,20.31) 13.12,20.53 13.12,27.85 13.12,27.85 13.12,28.82 arc(13.17,29.08) 13.32,29.3 16.05,32.03 arc(16.09,32.09) 16.11,32.16 16.11,35.89 arc(16.16,36.15) 16.31,36.37 17.83,37.89 arc(17.88,37.95) 17.92,38.01 17.99,38.1 arc(17.99,38.11) 17.99,38.11 arc(18.22,38.51) 18.37,38.95 arc(18.38,39.02) 18.39,39.09 18.41,39.45 arc(18.41,39.49) 18.41,39.52 arc(18.41,39.53) 18.41,39.54 arc(18.44,39.79) 18.5,40.04 arc(18.53,40.11) 18.58,40.17 18.75,40.35 arc(18.84,40.45) 18.9,40.56 18.92,40.63 18.93,40.64 arc(18.95,40.74) 18.96,40.85 18.96,41.04
  BOTTOM w0.3: 18.96,41.04 TP3011.1

## Copper pours and planes (outline as drawn; the poured copper is in the pictures)
GND on TOP (solid shape): 12.34,20.53 12.34,20.42 12.35,20.31 12.36,20.18 12.39,20.04 12.09,20.04 12.07,20.16 12.05,20.36 12.05,20.48 12.05,25.85 12.34,25.85
GND on TOP (solid shape): 13.72,20.53 13.73,20.4 13.76,20.27 13.79,20.21 13.81,20.15 13.81,20.08 13.75,20.04 13.19,20.04 13.18,20.08 13.12,20.3 13.11,20.53 13.11,25.85 13.72,25.85
GND on TOP (solid shape): 1.6,3.01 1.6,2.98 1.58,2.88 1.57,2.81 1.57,2 1.57,1.96 1.56,1.92 1.51,1.83 1.47,1.74 1.37,1.52 1.33,1.28 1.33,0.89 1.22,0.6 1.21,0.53 1.22,0.44 1.27,0.36 1.28,0.26 1.19,0.2 0.3,0.2 0.23,0.23 0.2,0.3 0.2,3.2 0.23,3.27 0.3,3.3 0.59,3.39 0.77,3.63 0.78,3.67 1.6,3.67
GND on TOP (solid shape): 16.96,41.87 16.59,41.51 16.59,41.5 14.94,39.85 14.9,39.8 14.87,39.74 14.85,39.65 14.84,39.55 14.84,32.83 12.99,30.92 12.51,30.44 12.44,30.33 12.41,30.19 12.41,25.71 11.97,25.71 11.97,32.22 13.37,33.62 13.44,33.73 13.47,33.86 13.47,41.24 13.48,41.5 13.53,41.77 13.53,41.79 13.6,41.91 13.62,41.93 15.02,43.33 15.05,43.34 15.25,43.35 15.38,43.4 15.41,43.42
GND on TOP (solid shape): 2.45,3.63 2.51,3.46 2.62,3.32 3.42,2.52 3.43,2.5 3.43,1.12 3.18,0.87 2.83,0.72 2.77,0.55 2.79,0.45 2.84,0.37 2.85,0.26 2.76,0.2 2.31,0.2 2.22,0.26 2.23,0.37 2.28,0.45 2.3,0.55 2.29,0.62 2.26,0.69 2.11,0.95 2.11,1.43 2.09,1.58 1.98,1.78 1.97,1.85 1.97,2.81 1.99,2.9 2,2.97 2,3.67 2.44,3.67
GND on TOP (solid shape): 4.58,3.63 4.76,3.39 5.05,3.3 5.7,3.3 5.77,3.27 5.8,3.2 5.8,0.3 5.77,0.23 5.7,0.2 3.33,0.2 3.23,0.26 3.25,0.37 3.29,0.42 3.31,0.48 3.36,0.69 3.62,0.94 3.66,0.96 3.7,0.92 3.7,0.8 3.64,0.71 3.62,0.61 3.9,0.34 4.18,0.61 4.14,0.75 4.05,0.85 4.05,2.59 4.02,2.75 3.92,2.89 3.32,3.5 3.3,3.61 3.39,3.67 4.57,3.67
GND on TOP (solid shape): 13.71,46.54 15.37,46.11 15.43,46.04 15.4,45.94 14.37,44.91 14.19,44.91 14.19,44.98 14.21,45 14.37,45.21 14.43,45.48 13.8,46.11 13.17,45.48 13.34,45.05 13.75,44.85 13.79,44.83 13.8,44.79 13.79,44.76 13.79,44.21 13.84,44.1 13.95,44.06 14.49,44.06 14.55,44.07 14.6,44.1 14.67,44.12 14.74,44.09 14.98,43.85 14.75,43.63 14.75,43.62 13.37,42.24 13.31,42.18 13.26,42.11 13.19,41.99 13.16,41.92 13.14,41.85 13.1,41.62 13.08,41.31 13.08,41.24 13.08,33.88 11.64,32.44 11.59,32.37 11.58,32.29 11.58,25.71 11.2,25.71 11.2,45.88 11.43,46.45 12,46.68
GND on TOP (solid shape): 11.6,20.14 11.65,19.87 11.8,19.39 12.14,18.78 12.43,18.44 13.14,17.74 14.06,17.11 15.16,16.88 15.28,16.77 15.28,15.74 15.27,15.67 15.23,15.56 13.53,14.52 12.32,12.94 11.98,12.46 11.52,12.09 11.36,12.01 11.19,11.97 5.86,11.03 3.25,9.73 1.76,7.23 1.76,7.22 1.65,6.67 1.6,6.11 1.6,6.06 0.91,6.06 0.83,6.09 0.8,6.16 2.26,9.86 5.72,11.82 10.02,12.57 11.33,13.33 11.84,14.74 11.84,16.48 11.75,16.94 11.49,17.33 11.43,17.38 11.26,17.64 11.2,17.95 11.2,20.18 11.59,20.18
GND on TOP (solid shape): 13.88,20.18 13.94,20.1 14,20.02 14.71,19.31 14.94,19.16 15.21,19.11 15.7,19.11 16.97,18.58 17.5,17.31 17.5,15.27 17.15,14.2 16.23,13.55 15.1,12.94 14.31,11.93 12.54,9.85 10.03,8.77 6.37,8.12 5.11,7.43 4.55,6.1 4.55,6.06 3.16,6.06 3.09,6.09 3.06,6.16 3.96,8.38 6.04,9.58 6.11,9.59 10.97,10.45 11.73,10.58 12.1,10.67 12.41,10.78 12.67,10.98 12.75,11.05 13.23,11.64 13.62,12.28 14.61,13.53 16,14.28 16.53,14.65 16.73,15.27 16.73,17.31 16.43,18.04 15.7,18.34 15.21,18.34 14.64,18.45 14.17,18.77 13.46,19.47 13.25,19.74 13.1,20.06 13.08,20.18
GND on TOP (solid shape): 18.68,40.15 18.65,40.1 18.62,40.03 18.6,39.96 18.59,39.88 18.58,39.81 18.58,39.72 18.51,39.59 18.49,39.55 18.48,39.5 18.48,39.45 18.49,39.4 18.51,39.36 18.53,39.31 18.56,39.28 18.6,39.25 18.64,39.22 18.68,39.21 18.73,39.2 18.78,39.2 18.83,39.21 18.87,39.22 18.91,39.25 18.95,39.28 18.98,39.31 19,39.36 19.02,39.4 19.03,39.45 19.03,39.5 19.02,39.55 19,39.59 18.93,39.72 18.93,39.8 18.98,39.85 19.98,38.86 20.45,39.33 20.65,39.33 20.65,38.78 20.65,38.76 20.66,38.73 20.67,38.7 20.69,38.67 20.72,38.65 20.75,38.63 20.78,38.63 20.8,38.63 21.35,38.63 21.37,38.63 21.4,38.63 21.43,38.65 21.46,38.67 21.48,38.7 21.49,38.73 21.5,38.76 21.5,38.78 21.5,39.33 21.5,39.34 21.49,39.38 21.48,39.41 21.46,39.43 21.43,39.45 21.4,39.47 21.37,39.48 21.35,39.48 20.8,39.48 20.78,39.48 20.75,39.47 20.72,39.45 20.67,39.41 20.66,39.38 20.65,39.34 20.65,39.33 20.45,39.33 21.34,40.22 21.35,40.23 21.37,40.24 21.4,40.25 21.43,40.25 21.46,40.24 21.48,40.22 21.5,40.2 21.55,40.06 21.64,39.81 21.73,39.55 21.78,39.39 21.79,39.31 21.8,39.23 21.8,39.19 21.8,37.38 21.8,37.34 21.79,37.26 21.78,37.18 21.75,37.11 21.72,37.04 21.69,36.97 21.64,36.9 21.59,36.84 21.54,36.79 21.48,36.74 21.41,36.69 21.34,36.66 21.27,36.63 21.19,36.6 21.12,36.59 21.04,36.58 21,36.58 19.58,36.58 19.53,36.58 19.43,36.57 19.33,36.55 19.23,36.53 19.14,36.5 19.05,36.46 18.96,36.41 18.88,36.36 18.8,36.3 18.73,36.23 18.66,36.16 18.6,36.08 18.54,35.99 18.5,35.91 18.46,35.82 18.42,35.72 18.4,35.63 18.38,35.53 18.38,35.43 18.37,35.38 18.37,31.58 18.37,31.52 18.37,31.39 18.35,31.27 18.33,31.14 18.3,31.02 18.26,30.9 18.21,30.78 18.16,30.67 18.1,30.56 18.03,30.45 17.96,30.35 17.88,30.26 17.79,30.16 17.7,30.08 17.6,30 17.5,29.92 17.39,29.86 17.28,29.8 17.17,29.74 17.05,29.7 16.93,29.66 16.81,29.63 16.69,29.6 16.56,29.59 16.44,29.58 16.38,29.58 15.41,29.58 15.37,29.58 15.27,29.57 15.18,29.56 15.09,29.53 15,29.51 14.91,29.47 14.83,29.43 14.75,29.38 14.67,29.32 14.6,29.26 14.57,29.23 14.15,28.81 14.12,28.78 14.06,28.71 14,28.63 13.95,28.55 13.91,28.47 13.87,28.38 13.84,28.29 13.82,28.2 13.81,28.11 13.8,28.01 13.8,27.96 13.8,25.71 13.03,25.71 13.03,30.08 13.43,30.48 15.23,32.27 15.25,32.3 15.3,32.36 15.35,32.43 15.38,32.49 15.41,32.57 15.43,32.64 15.45,32.72 15.46,32.79 15.46,32.83 15.46,37.92 20.12,37.92 20.12,37.85 20.13,37.77 20.14,37.71 20.16,37.64 20.2,37.57 20.23,37.51 20.28,37.46 20.33,37.41 20.38,37.36 20.44,37.33 20.51,37.3 20.57,37.27 20.64,37.26 20.71,37.25 20.79,37.25 20.86,37.26 20.93,37.27 20.99,37.3 21.06,37.33 21.12,37.36 21.17,37.41 21.22,37.46 21.27,37.51 21.3,37.57 21.34,37.64 21.36,37.71 21.37,37.77 21.38,37.85 21.38,37.92 21.37,37.99 21.36,38.06 21.34,38.12 21.3,38.19 21.27,38.25 21.22,38.3 21.17,38.35 21.12,38.4 21.06,38.44 20.99,38.47 20.93,38.49 20.86,38.51 20.79,38.51 20.71,38.51 20.64,38.51 20.57,38.49 20.51,38.47 20.44,38.44 20.38,38.4 20.33,38.35 20.28,38.3 20.23,38.25 20.2,38.19 20.16,38.12 20.14,38.06 20.13,37.99 20.12,37.92 15.46,37.92 15.46,39.31 15.46,39.35 15.46,39.44 15.49,39.52 16.77,40.81 16.85,40.84 16.9,40.84 16.93,40.84 17.57,40.84 17.61,40.84 17.69,40.85 17.76,40.87 17.84,40.9 17.9,40.93
GND on TOP (solid shape): 12.45,20.14 12.47,20 12.51,19.86 12.72,19.42 13.02,19.04 13.73,18.33 14.41,17.88 15.21,17.72 15.7,17.72 15.99,17.6 16.11,17.31 16.11,15.27 16.03,15.02 15.82,14.88 14.21,14 13.07,12.56 12.72,12 12.3,11.48 12.25,11.42 12.22,11.41 12.16,11.37 12.06,11.31 11.94,11.27 11.61,11.19 6,10.2 3.49,8.79 2.44,6.11 2.44,6.06 2.1,6.06 2.03,6.09 2,6.16 3.18,9.09 5.92,10.64 11.26,11.58 11.5,11.64 11.72,11.75 11.99,11.93 12.23,12.15 12.23,12.15 12.48,12.44 12.67,12.76 13.8,14.23 15.39,15.2 15.43,15.21 15.53,15.29 15.61,15.4 15.67,15.63 15.67,15.74 15.67,16.79 15.65,16.91 15.58,17.02 15.48,17.14 15.34,17.24 15.17,17.28 14.45,17.39 13.79,17.71 13.6,17.86 13.42,18.02 12.71,18.72 12.46,19.01 12.26,19.34 12.17,19.54 12.09,19.73 12.05,19.9 12.01,20.06 12.03,20.15 12.11,20.18 12.44,20.18
GND on BOTTOM (solid shape): 11.8,21.61 11.8,21.6 11.8,20.47 11.83,20.1 11.28,20.1 11.28,25.85 11.8,25.85
GND on BOTTOM (solid shape): 12.87,20.53 12.89,20.32 12.93,20.1 12.66,20.1 12.64,20.21 12.62,20.3 12.62,20.39 12.61,20.48 12.61,21.25 12.61,25.85 12.87,25.85
GND on BOTTOM (solid shape): 2.89,5.95 2.89,3.89 2.93,3.7 3.04,3.53 3.05,3.52 2.64,3.52 2.64,4.71 2.64,4.71 2.64,5.95 2.64,6.03 2.64,6.13 2.89,6.13
GND on BOTTOM (solid shape): 4.4,6.13 4.46,6.11 4.48,6.05 4.47,5.96 4.47,3.8 4.48,3.71 4.51,3.62 4.5,3.55 4.43,3.52 4.31,3.52 3.78,4.05 3.77,4.07 3.77,4.09 3.77,5.95 3.77,6.13
GND on BOTTOM (solid shape): 18.5,40.34 18.45,40.29 18.38,40.2 18.33,40.09 18.27,39.82 18.23,39.5 18.22,39.1 18.21,39.05 18.2,38.99 18.06,38.58 17.85,38.21 17.78,38.11 17.74,38.06 17.7,38.02 16.18,36.5 16,36.22 15.93,35.89 15.93,32.17 15.92,32.15 13.2,29.42 13.01,29.14 12.95,28.82 12.95,27.85 12.95,27.82 12.95,25.75 12.54,25.75 12.54,31.22 14.25,32.93 14.36,33.1 14.4,33.29 14.4,40.84 15.98,42.42 16.41,42.42
GND on BOTTOM (solid shape): 1.9,3.11 1.91,3 1.95,2.89 1.96,2.87 1.96,2.81 1.93,2.81 1.93,2.68 1.87,2.68 1.69,2.68 1.64,2.67 1.6,2.65 1.56,2.67 1.52,2.68 1.27,2.68 1.18,2.64 1.14,2.55 1.14,2.02 1.14,1.99 1.17,1.94 1.17,1.88 1.14,1.88 1.14,1.51 1.14,1.47 1.14,0.94 1.16,0.88 1.21,0.83 1.26,0.77 1.25,0.68 1.22,0.61 1.21,0.53 1.22,0.44 1.27,0.36 1.28,0.26 1.19,0.2 0.3,0.2 0.23,0.23 0.2,0.3 0.2,3.2 0.23,3.27 0.3,3.3 0.59,3.39 0.77,3.63 0.78,3.66 1.9,3.66
GND on BOTTOM (solid shape): 13.71,46.54 15.37,46.11 15.43,46.04 15.4,45.94 14.37,44.91 14.19,44.91 14.19,44.98 14.21,45 14.37,45.21 14.43,45.48 13.8,46.11 13.17,45.48 13.34,45.05 13.75,44.85 13.79,44.83 13.8,44.79 13.79,44.76 13.79,44.21 13.84,44.1 13.95,44.06 14.49,44.06 14.55,44.07 14.6,44.1 14.67,44.12 14.74,44.09 15.72,43.11 13.83,41.21 13.75,41.08 13.73,40.93 13.73,40.93 13.73,33.36 12.01,31.64 11.91,31.48 11.87,31.3 11.87,25.75 11.2,25.75 11.2,45.88 11.43,46.45 12,46.68
GND on BOTTOM (solid shape): 4.58,3.63 4.76,3.39 5.05,3.3 5.7,3.3 5.77,3.27 5.8,3.2 5.8,0.3 5.77,0.23 5.7,0.2 3.33,0.2 3.23,0.26 3.25,0.37 3.3,0.45 3.32,0.55 3.32,0.59 3.3,0.64 3.3,0.69 3.37,0.69 3.37,0.82 3.54,0.82 3.62,0.78 3.64,0.69 3.63,0.65 3.62,0.61 3.9,0.34 4.18,0.61 4.17,0.65 4.16,0.69 4.18,0.78 4.26,0.82 4.38,0.82 4.38,0.69 4.84,0.69 4.84,0.87 4.87,0.95 5.02,0.95 5.33,1.08 5.45,1.38 5.45,2.07 5.31,2.4 4.98,2.54 4.87,2.54 4.84,2.63 4.84,2.66 4.83,2.66 4.83,2.77 4.82,2.84 4.78,2.91 4.75,2.96 4.72,3.01 4.6,3.13 4.56,3.16 4.23,3.49 4.21,3.6 4.3,3.66 4.57,3.66
GND on BOTTOM (solid shape): 13.84,20.28 13.91,20.14 14,20.02 14.71,19.31 14.94,19.16 15.21,19.11 15.7,19.11 16.97,18.58 17.5,17.31 17.5,15.27 17.15,14.2 16.23,13.55 15.1,12.94 14.31,11.93 12.54,9.85 10.03,8.77 6.37,8.12 5.09,7.4 4.55,6.04 4.55,5.99 3.8,5.99 3.72,6.02 3.69,6.09 3.71,6.28 3.73,6.46 3.74,6.49 4.52,8.05 6.03,8.93 6.14,8.95 6.22,8.97 12.47,10.07 12.68,10.14 12.87,10.28 13.39,10.8 13.4,10.81 13.83,11.38 14.19,11.99 15.02,13.03 16.19,13.67 17.05,14.27 17.38,15.27 17.38,17.31 16.88,18.49 15.7,18.98 15.21,18.98 14.89,19.04 14.62,19.22 13.92,19.93 13.81,20.06 13.73,20.21 13.73,20.22 13.73,20.28
GND on BOTTOM (solid shape): 21.34,40.22 21.35,40.23 21.37,40.24 21.4,40.25 21.43,40.25 21.46,40.24 21.48,40.22 21.5,40.2 21.55,40.06 21.64,39.81 21.73,39.55 21.78,39.39 21.79,39.31 21.8,39.23 21.8,39.19 21.8,37.38 21.8,37.34 21.79,37.26 21.78,37.18 21.75,37.11 21.72,37.04 21.69,36.97 21.64,36.9 21.59,36.84 21.54,36.79 21.48,36.74 21.41,36.69 21.34,36.66 21.27,36.63 21.19,36.6 21.12,36.59 21.04,36.58 21,36.58 19.58,36.58 19.53,36.58 19.43,36.57 19.33,36.55 19.23,36.53 19.14,36.5 19.05,36.46 18.96,36.41 18.88,36.36 18.8,36.3 18.73,36.23 18.66,36.16 18.6,36.08 18.54,35.99 18.5,35.91 18.46,35.82 18.42,35.72 18.4,35.63 18.38,35.53 18.38,35.43 18.37,35.38 18.37,31.58 18.37,31.52 18.37,31.39 18.35,31.27 18.33,31.14 18.3,31.02 18.26,30.9 18.21,30.78 18.16,30.67 18.1,30.56 18.03,30.45 17.96,30.35 17.88,30.26 17.79,30.16 17.7,30.08 17.6,30 17.5,29.92 17.39,29.86 17.28,29.8 17.17,29.74 17.05,29.7 16.93,29.66 16.81,29.63 16.69,29.6 16.56,29.59 16.44,29.58 16.38,29.58 15.41,29.58 15.37,29.58 15.27,29.57 15.18,29.56 15.09,29.53 15,29.51 14.91,29.47 14.83,29.43 14.75,29.38 14.67,29.32 14.6,29.26 14.57,29.23 14.15,28.81 14.12,28.78 14.06,28.71 14,28.63 13.95,28.55 13.91,28.47 13.87,28.38 13.84,28.29 13.82,28.2 13.81,28.11 13.8,28.01 13.8,27.96 13.8,25.75 13.68,25.75 13.67,28.01 13.67,28.82 13.67,28.83 13.68,28.87 13.7,28.9 13.71,28.91 16.47,31.67 16.5,31.7 16.54,31.75 16.58,31.81 16.61,31.88 16.63,31.94 16.65,32.01 16.66,32.08 16.66,32.12 16.66,35.89 16.66,35.91 16.67,35.94 16.68,35.97 16.7,35.98 18.27,37.56 18.29,37.58 18.32,37.62 18.45,37.8 18.49,37.87 18.52,37.92 20.12,37.92 20.12,37.85 20.13,37.77 20.14,37.71 20.16,37.64 20.2,37.57 20.23,37.51 20.28,37.46 20.33,37.41 20.38,37.36 20.44,37.33 20.51,37.3 20.57,37.27 20.64,37.26 20.71,37.25 20.79,37.25 20.86,37.26 20.93,37.27 20.99,37.3 21.06,37.33 21.12,37.36 21.17,37.41 21.22,37.46 21.27,37.51 21.3,37.57 21.34,37.64 21.36,37.71 21.37,37.77 21.38,37.85 21.38,37.92 21.37,37.99 21.36,38.06 21.34,38.12 21.3,38.19 21.27,38.25 21.22,38.3 21.17,38.35 21.12,38.4 21.06,38.44 20.99,38.47 20.93,38.49 20.86,38.51 20.79,38.51 20.71,38.51 20.64,38.51 20.57,38.49 20.51,38.47 20.44,38.44 20.38,38.4 20.33,38.35 20.28,38.3 20.23,38.25 20.2,38.19 20.16,38.12 20.14,38.06 20.13,37.99 20.12,37.92 18.52,37.92 18.58,38.01 18.66,38.16 18.73,38.31 18.79,38.46 18.85,38.61 18.89,38.77 18.93,38.93 18.96,39.09 18.99,39.26 19,39.34 19.01,39.36 19.02,39.4 19.03,39.45 19.03,39.5 19.02,39.55 19,39.59 18.93,39.72 18.94,39.81 18.95,39.82 18.97,39.83 18.99,39.83 19.02,39.81 19.98,38.86 20.45,39.33 20.65,39.33 20.65,38.78 20.65,38.76 20.66,38.73 20.67,38.7 20.69,38.67 20.72,38.65 20.75,38.63 20.78,38.63 20.8,38.63 21.35,38.63 21.37,38.63 21.4,38.63 21.43,38.65 21.46,38.67 21.48,38.7 21.49,38.73 21.5,38.76 21.5,38.78 21.5,39.33 21.5,39.34 21.49,39.38 21.48,39.41 21.46,39.43 21.43,39.45 21.4,39.47 21.37,39.48 21.35,39.48 20.8,39.48 20.78,39.48 20.75,39.47 20.72,39.45 20.67,39.41 20.66,39.38 20.65,39.34 20.65,39.33 20.45,39.33
GND on BOTTOM (solid shape): 12.26,19.13 12.64,18.65 13.35,17.95 14.2,17.38 15.21,17.18 15.42,17.18 15.53,17.13 15.57,17.03 15.54,15.39 15.5,15.34 14.05,14.57 12.91,13.37 12.91,13.36 12.74,13.09 12.58,12.81 12.41,12.51 12.22,12.22 12.19,12.19 12.02,12.03 11.99,12.01 11.71,11.83 11.45,11.73 11.41,11.72 11.21,11.67 10.76,11.59 1.9,5.99 0.8,5.99 0.8,6.04 2.22,9.81 5.72,11.82 10.02,12.57 11.33,13.33 11.84,14.74 11.84,16.48 11.75,16.94 11.49,17.33 11.43,17.38 11.26,17.64 11.2,17.95 11.2,20.28 11.88,20.28
GND on BOTTOM (solid shape): 12.97,20.24 13,20.14 13.03,20.03 13.18,19.7 13.4,19.42 14.11,18.71 14.61,18.37 15.21,18.26 15.7,18.26 16.37,17.98 16.65,17.31 16.65,15.27 16.46,14.7 15.98,14.36 14.55,13.59 13.55,12.32 13.31,11.9 13.03,11.5 12.86,11.3 12.36,10.8 12.34,10.78 6.09,9.68 5.99,9.66 5.86,9.64 3.99,8.55 3.02,6.62 2.98,6.31 2.97,6.04 2.96,5.99 2.67,5.99 2.59,6.02 2.56,6.09 3.59,8.7 6.02,10.08 11.55,11.06 11.62,11.08 11.69,11.11 11.95,11.21 12.01,11.23 12.06,11.26 12.35,11.45 12.41,11.49 12.47,11.54 12.64,11.7 12.7,11.76 12.75,11.82 12.88,12 13,12.19 13.09,12.35 13.18,12.51 14.09,13.72 15.35,14.57 15.54,14.65 15.74,14.72 15.81,14.75 15.89,14.8 16.15,15.1 16.24,15.49 16.24,17.03 16,17.6 15.42,17.84 15.21,17.84 14.7,17.91 14.23,18.1 14.01,18.25 13.82,18.42 13.11,19.12 12.83,19.48 12.64,19.89 12.6,20.01 12.58,20.1 12.56,20.19 12.56,20.23 12.57,20.27 12.61,20.28 12.97,20.28
GND on TOP (solid shape): 1.53,6.16 1.53,6.06 1.52,5.96 1.52,4.28 1.52,3.52 0.92,3.52 0.86,3.55 0.85,3.62 0.87,3.71 0.88,3.8 0.88,5.96 0.88,6.06 0.88,6.16
GND on TOP (solid shape): 4.4,6.16 4.46,6.14 4.48,6.09 4.48,6.02 4.47,5.96 4.47,3.8 4.48,3.71 4.5,3.62 4.49,3.55 4.43,3.52 3.4,3.52 3.13,3.79 3.13,5.96 3.13,6.06 3.14,6.16
GND on TOP (solid shape): 18.1,44.4 18.1,44.54 18.24,44.55 19.21,43.69 20.07,42.72 20.06,42.58 19.92,42.58
GND on BOTTOM (solid shape): 1.82,5.96 1.82,5.69 1.82,3.52 0.92,3.52 0.85,3.55 0.84,3.62 0.87,3.71 0.88,3.8 0.88,5.96 0.88,6.04 0.88,6.13 1.82,6.13
GND on BOTTOM (solid shape): 18.1,44.4 18.1,44.54 18.24,44.55 19.21,43.69 20.07,42.72 20.06,42.58 19.92,42.58
GND on BOTTOM (solid shape): 3.03,3.66 3.06,3.62 3.09,3.58 3.82,2.86 3.84,2.74 3.75,2.68 3.44,2.68 3.38,2.67 3.28,2.77 3.26,2.81 3.05,3 2.99,3.04 2.96,3.04 2.92,3.06 2.56,3.41 2.56,3.66

Small or netless copper shapes (teardrops, artwork), in the pictures only: 21 on TOP, 49 on BOTTOM

## Text on the board
Ref Des/Silkscreen Top: De6la HF
User.38: FIGURE | FINISHED_SIZE | 0.127 | 0.15 | 0.86 | DRILL CHART: TOP to BOTTOM | ALL UNITS ARE IN MILLIMETERS | PLATED | NON-PLATED | QTY | 20 | 110 | 2 | 132 | TOTAL HOLES:
